# Altium PCB Guillaume_Lanfroid-Nazac.PcbDoc (part 1 of 2)
Units mil, origin at the board's own origin, x right, y up, seen from the top; angles counter-clockwise.
Board outline 2755.91 x 1968.5 mil, 4 copper layers (Top Layer 1, GND, VCC, Bottom Layer 1), stack 61.948 mil thick; 93 components, 75 nets, 367 pads, 172 vias.
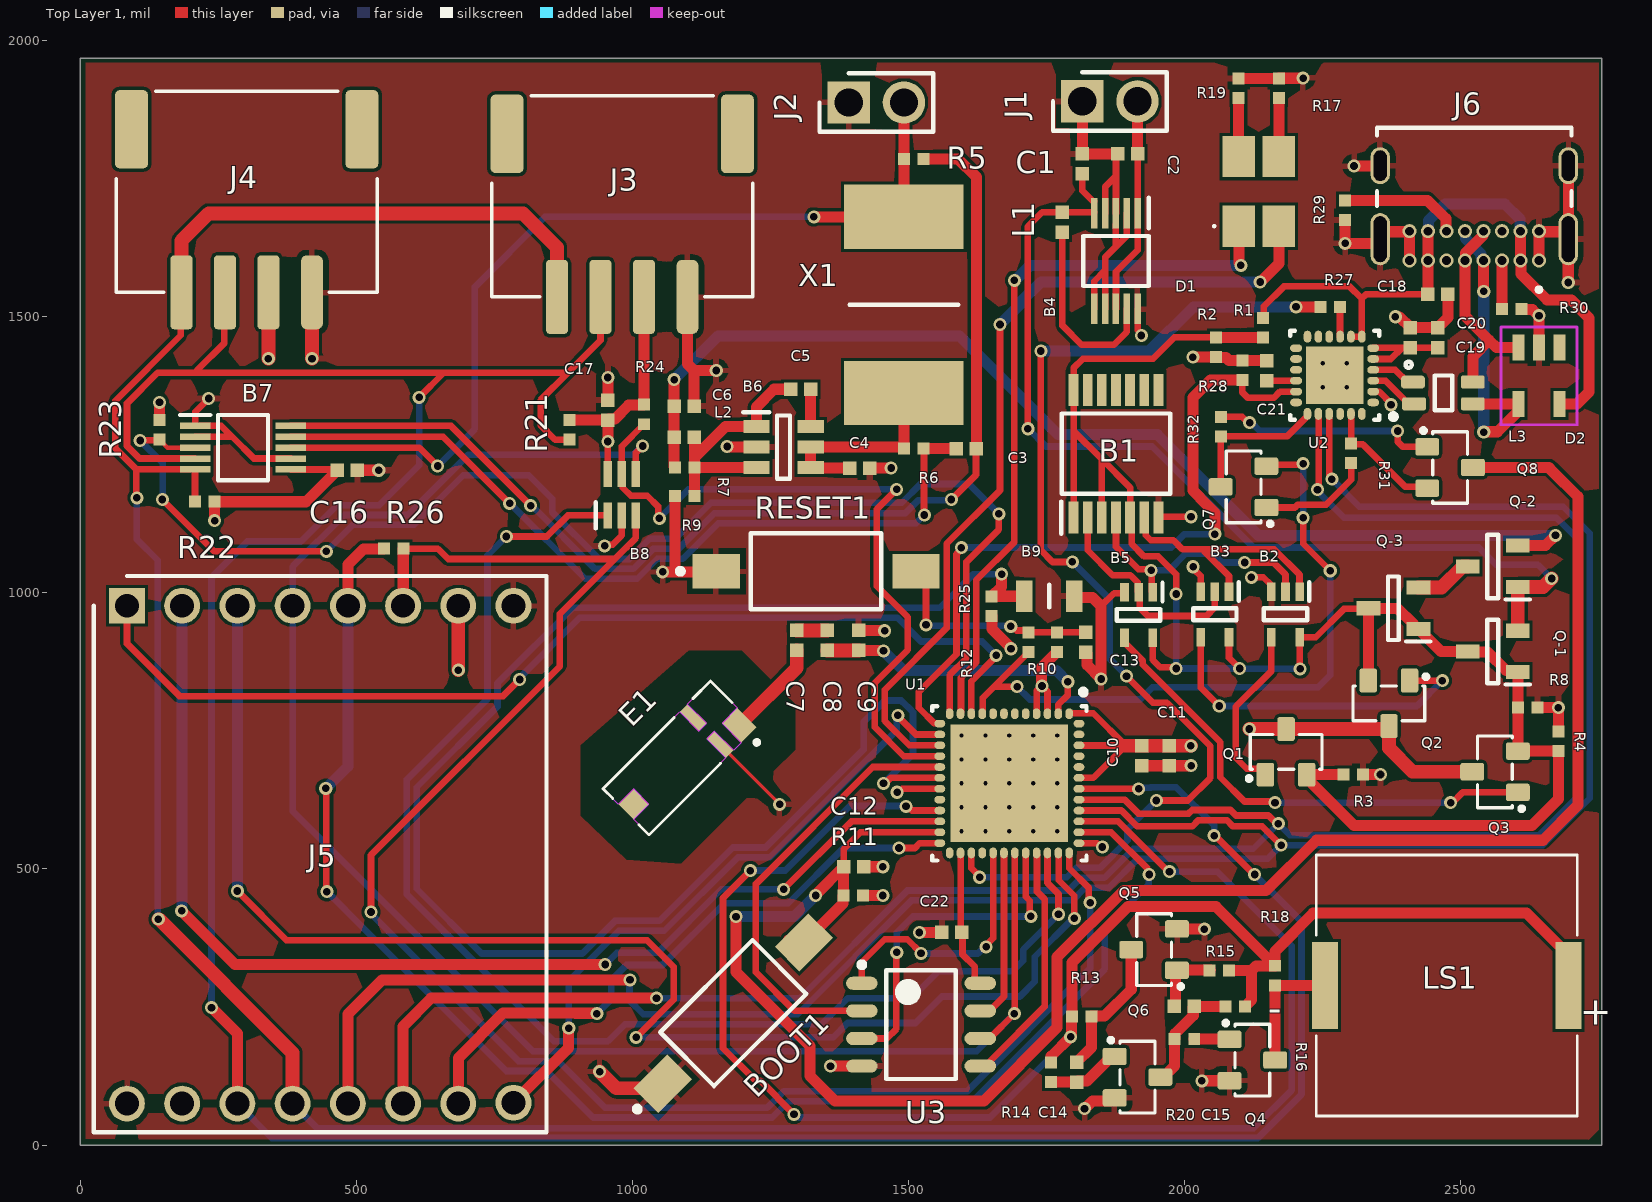
[diagram p0: Top Layer 1 view]
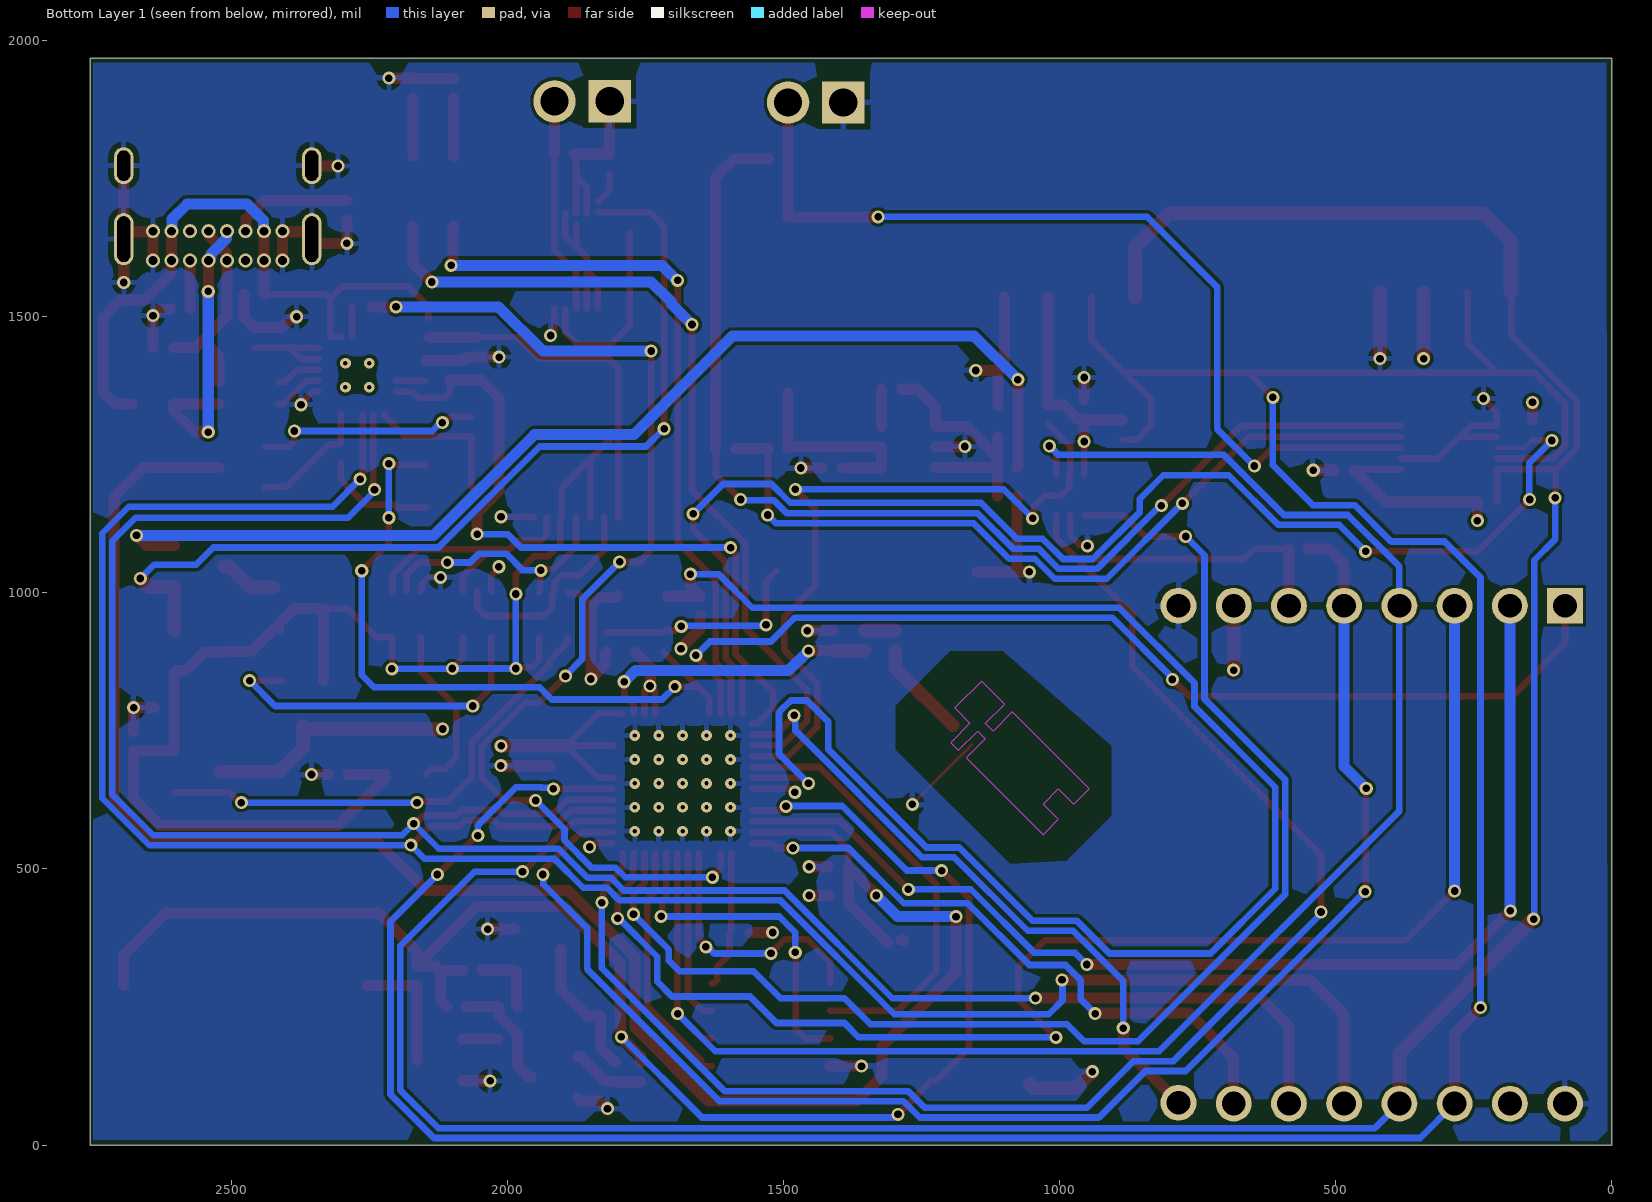
[diagram p1: Bottom Layer 1 view, seen from below]
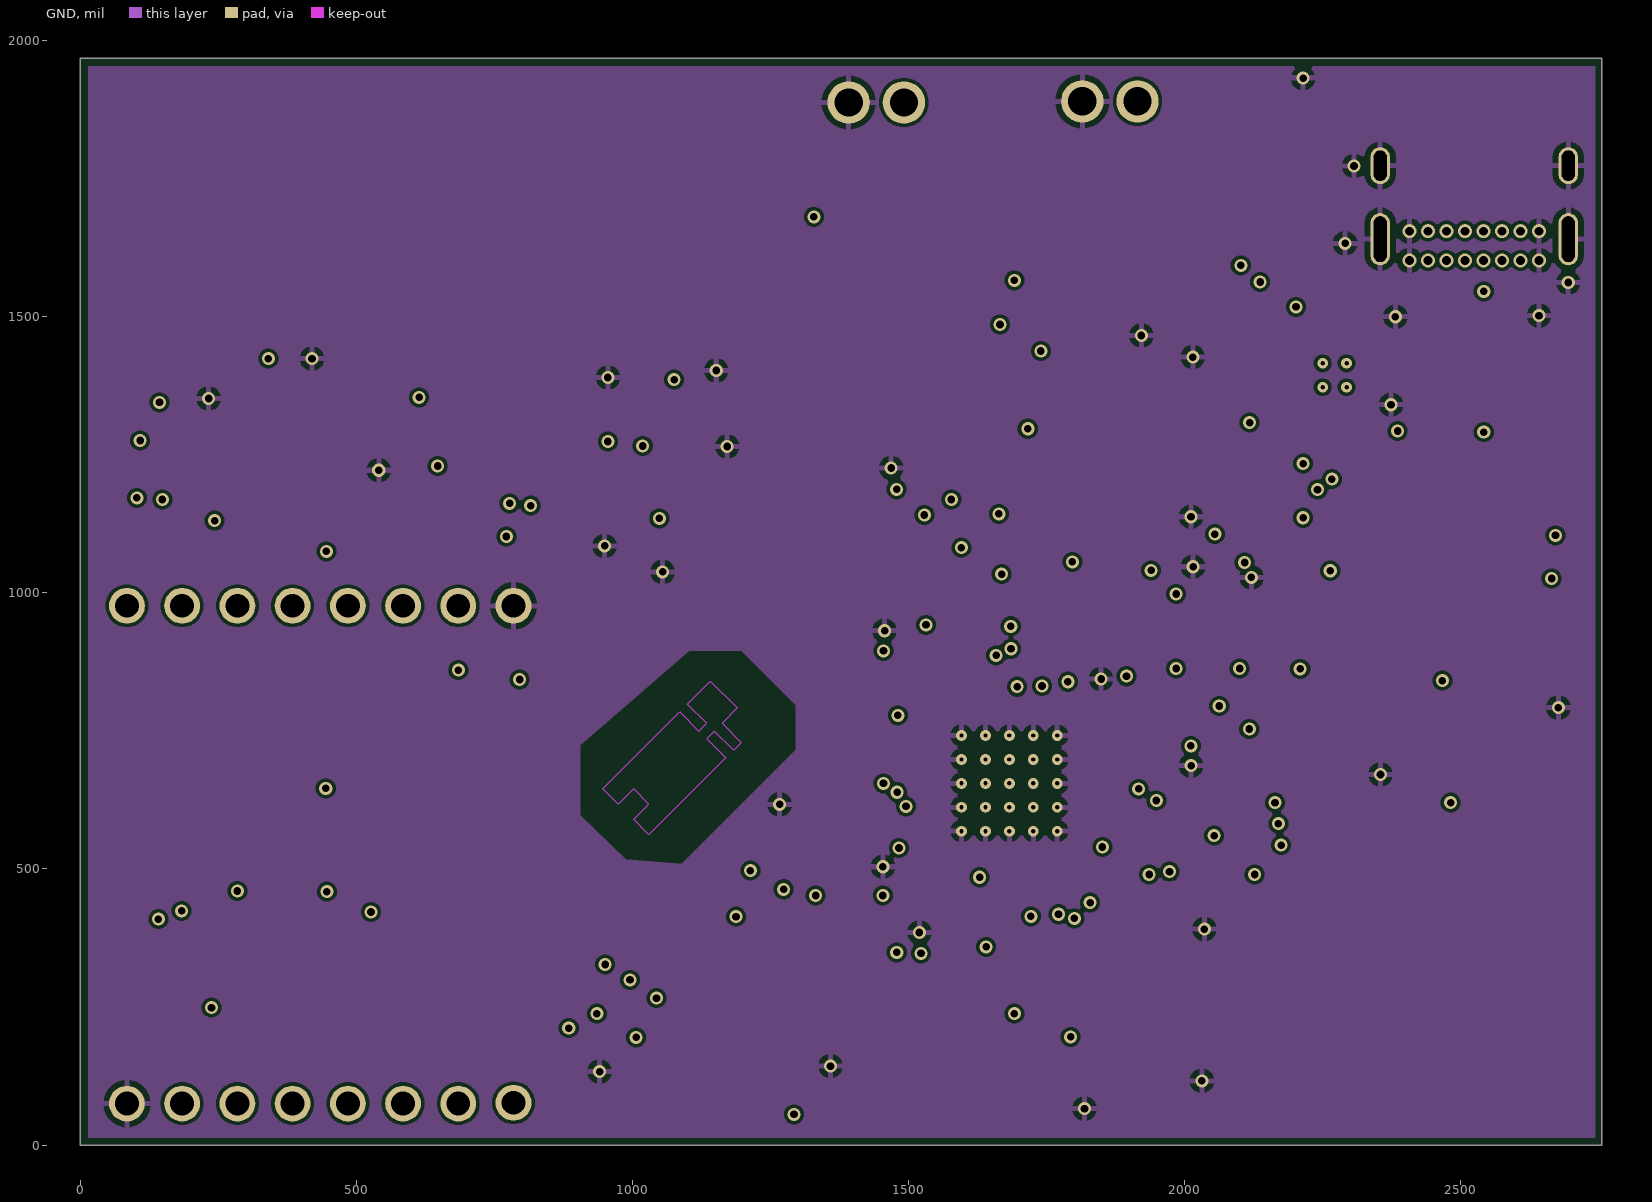
[diagram p2: GND]
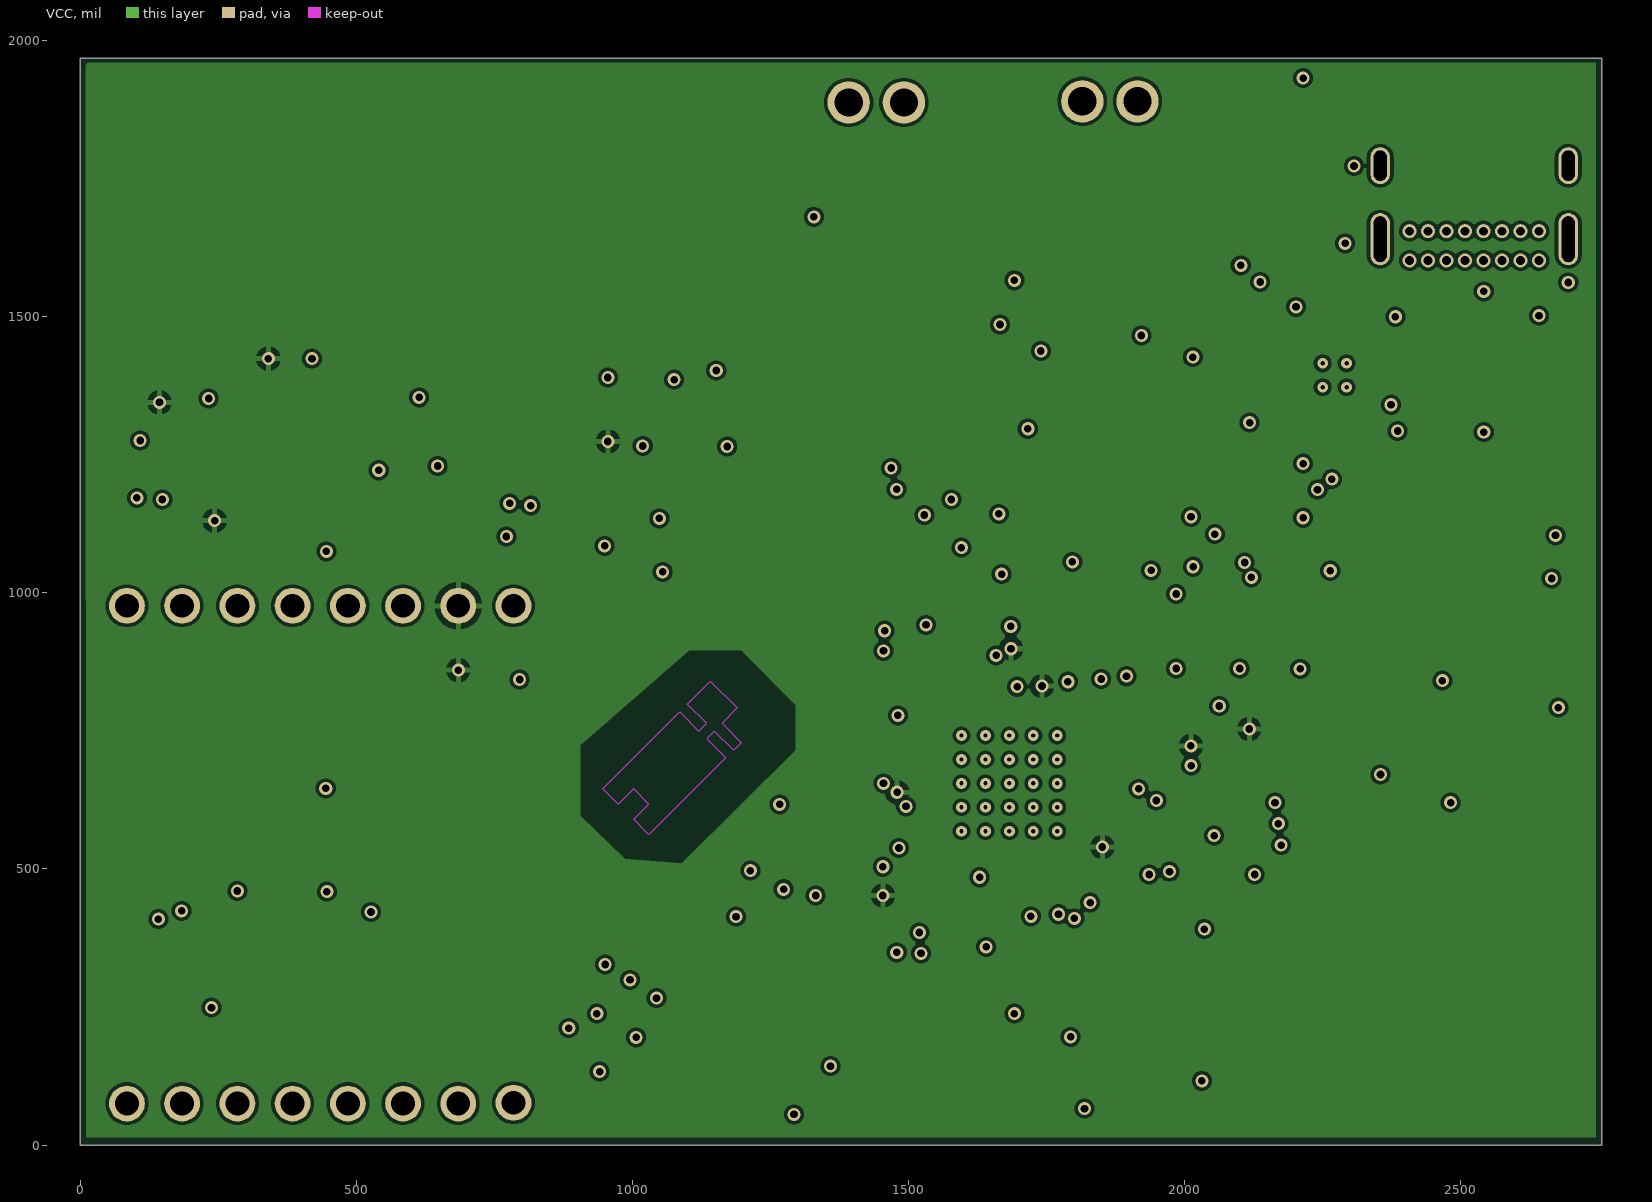
[diagram p3: VCC]

## Layer stack, top to bottom
Top Solder: solder mask 0.4, Solder Resist, Dk 3.5
Top Layer 1: signal copper 1.378
Dielectric 4: prepreg 7.1, PP-021, Dk 4.7
Dielectric 2: prepreg 7.1, PP-021, Dk 4.7
GND: signal copper 1.4
Dielectric 1: core 27.9921, Core-042, Dk 4.8
VCC: signal copper 1.4
Dielectric 3: prepreg 7.1, PP-021, Dk 4.7
Dielectric 5: prepreg 7.1, PP-021, Dk 4.7
Bottom Layer 1: signal copper 1.378
Bottom Solder: solder mask 0.4, Solder Resist, Dk 3.5

## Board outline
0,0 2755.91,0 2755.91,1968.5 0,1968.5

## Design rules (kind name [scope] priority, off if disabled: settings)
Clearance Clearance_OLTTTPPP [OnOutside] p1: gap=5.91 ignorepadtopadclearanceinfootprint=TRUE
Clearance Clearance_ILTTTPPP [All] p2: gap=5.91 ignorepadtopadclearanceinfootprint=TRUE except(7.87: Arc-Hole Track-Hole SMDPad-Hole THPad-Hole Via-Hole Fill-Hole Poly-Hole Region-Hole)
HoleSize HoleSize_2 [InComponent('U2')] p1: absolutevalues=TRUE maxlimit=39370.08 minlimit=7.87 maxpercent=80.000 minpercent=20.000
HoleSize HoleSize_1 [InComponent('U1')] p2: absolutevalues=TRUE maxlimit=39370.08 minlimit=7.87 maxpercent=80.000 minpercent=20.000
HoleSize [All] p3: absolutevalues=TRUE maxlimit=39370.08 minlimit=9.84 maxpercent=80.000 minpercent=20.000
HoleToHoleClearance HoleToHoleClearance_uVia_same_layer_inner [IsMicroVia and ((StartLayer = 'Inner 1') and (StopLayer = 'Inner 2')) vs IsMicroVia and ((StartLayer = 'Inner 1') and (StopLayer = 'Inner 2'))] p1: gap=3.94 allowstackedmicrovias=FALSE
HoleToHoleClearance HoleToHoleClearance_uVia_same_layer_top [IsMicroVia and ((StartLayer = 'Top Layer') and (StopLayer = 'Inner 1')) vs IsMicroVia and ((StartLayer = 'Top Layer') and (StopLayer = 'Inner 1'))] p2: gap=3.94 allowstackedmicrovias=FALSE
HoleToHoleClearance HoleToHoleClearance_uVia [IsMicroVia vs IsMicroVia] p3: gap=0.39 allowstackedmicrovias=FALSE
HoleToHoleClearance [All] p4: gap=3.94 allowstackedmicrovias=FALSE
MinimumAnnularRing MinimumAnnularRing_uVia [IsMicroVia] p1: minimumring=3.54
MinimumAnnularRing MinimumAnnularRing_OAR [OnOutside] p2: minimumring=4.92
MinimumAnnularRing MinimumAnnularRing_IAR [All] p3: minimumring=4.92
MinimumSolderMaskSliver [All] p1: minsoldermaskwidth=2
PolygonConnect [All] p1: connectstyle=Relief reliefconductorwidth=10 reliefentries=4 polygonreliefangle="90 Angle" airgapwidth=10
RoutingVias RoutingVias_1 [InComponent('U1')] p1: holewidth=19.68 width=39.37 viastyle="Through Hole" minholewidth=19.68 minwidth=39.37 maxholewidth=1968.5 maxwidth=2362.2
RoutingVias RoutingVias_uVia [All] p2: holewidth=3.94 width=11.02 viastyle="Through Hole" minholewidth=3.94 minwidth=11.02 maxholewidth=3.94 maxwidth=11.02
RoutingVias [All] p3: holewidth=13.78 width=23.62 viastyle="Through Hole" minholewidth=3.94 minwidth=11.02 maxholewidth=118.11 maxwidth=127.95
SilkToSilkClearance [InComponent('U1')] p1: silktosilkclearance=10
SilkToSolderMaskClearance [IsText vs InComponent('U1')] p1: minsilkscreentomaskgap=10 clearancetoexposedcopper=TRUE
SolderMaskExpansion [All] p1: expansion=0 istentingtop=FALSE
SupplyNets "Schematic Supply Nets_2" [InNet('GND')] p1: voltage=0.000
SupplyNets "Schematic Supply Nets_1" [InNet('VBUS')] p2: voltage=0.000
SupplyNets "Schematic Supply Nets" [InNet('3V3')] p3: voltage=0.000
ViasUnderSMD [IsMicroVia] p1: allowed=TRUE
Width Width_ILTW [All] p1: maxlimit=118.11 minlimit=5.91 preferedwidth=5.91
25 further rules are at their usual default settings.

## Classes and differential pairs
component class UART: C18 C19 C20 C21 D2 J6 L3 Q7 Q8 R27 R28 R29 R30 R31 R32 U2
component class SPI: B8 B9 C17 R24 R25 R26
component class I2C: B7 C16 J3 J4 R21 R22 R23
component class HIM: BOOT1 C12 C13 C14 C15 D1 LS1 Q4 Q5 Q6 R10 R11 R12 R13 R14 R15 R16 R17 R18 R19 R20 RESET1
component class ESP: C10 C11 C22 U1
component class ANTENNE: C7 C8 C9 E1
component class ALIM_MOSFET: B1 B2 B3 B4 B5 B6 C1 C2 C3 C4 C5 C6 J1 J2 L1 L2 Q1 Q2 Q3 Q-1 Q-3 R1 R2 R3 R4 R5 R6 R7 R8 R9 X1

## Components (designator, comment, footprint, x,y, rotation, side; value= is the part's Value field where it differs from the comment)
B1 "74VHC05FT" SOP65P640X120-14N 1876,1252 r90 top
B2 "MC74VHC1GT08DFT2G" SOT65P210X110-5N 2183,961 r270 top
B3 "MC74VHC1GT08DFT2G" SOT65P210X110-5N 2055,961 r270 top
B4 "TPS62056DGSG4" SOP50P490X110-10N 1876,1601 r270 top
B5 "MC74VHC1GT08DFT2G" SOT65P210X110-5N 1917,960 r270 top
B6 "LMR50410Y3FQDBVRQ1" SOT95P280X145-6N 1274,1264 r0 top
B7 "INA237AIDGST" SOP50P490X110-10N 295.16,1262.89 r0 top
B8 "TMP126DCKR" SOT65P210X110-6N 981,1177.6 r90 top
B9 "NB12K00103JBB" RESC2212X50N 1755.43,994 r0 top
BOOT1 "FSMSM" TECO-FSMSM-2_V 1183,239 r45 top
C1 "22uF" CAPC1005X06N 1815,1777 r90 top
C2 "2,2uF" CAPC1005X06N 1897,1795 r180 top
C3 "50uF" CAPC1005X06N 1605,1261 r180 top
C4 "2,2uF" CAPC1005X06N 1412,1226 r0 top
C5 "0,1uF" CAPC1005X06N 1305,1369 r0 top
C6 "10uF" CAPC1005X06N 1094,1338 r0 top
C7 "0,9pF" CAPC1005X06N 1298.06,913.83 r90 top
C8 "0,6pF" CAPC1005X06N 1353.06,913.94 r270 top
C9 "1pF" CAPC1005X06N 1410.06,913.83 r270 top
C10 "10uF/6.3V(10%)" CAPC1005X06N 1923,705.11 r90 top
C11 "0.1uF/6.3V(10%)" CAPC1005X06N 1972.57,704.83 r90 top
C12 "1uF" CAPC1005X06N 1401,504 r0 top
C13 "1uF" CAPC1005X06N 1821,910.72 r270 top
C14 "0.01µF" CAPC1005X06N 1805,132 r270 top
C15 "0.01µF" CAPC1005X06N 2000,251 r0 top
C16 "100nF" CAPC1005X06N 484,1222 r0 top
C17 "0.1µF" CAPC1005X06N 956,1331 r90 top
C18 "1.5uF" CAPC1005X06N 2409,1462 r90 top
C19 "0.1uF" CAPC1005X06N 2459,1462 r90 top
C20 "1uF" CAPC1005X06N 2459,1541 r0 top
C21 "4.7uF" CAPC1005X06N 2149,1402 r90 top
C22 "100nF" CAPC1005X06N 1579,385 r180 top (schematic designator C?)
D1 "598-8610-207F" 5988610207F 2134.58,1727.01 r90 top
D2 "824011" 824011 2642,1393 r180 top
E1 "NN03-320" XCVR_NN03-320 1086,701 r45 top
J1 "61300211121" 61300211121 1815,1890 r0 top
J2 "61300211121" 61300211121 1392,1888 r0 top
J3 "114020164" 114020164 981.89,1685.61 r180 top
J4 "114020164" 114020164 301.89,1693.84 r180 top
J5 "825433-8" Connect-Mikrobus 85,976.57 r0 top
J6 "Use" USB4085-GF-A 2524.8,1773.5 r180 top
L1 "10uF" LQPC1005X06N 1669,1781.11 r90 top
L2 "3,3uH" LQPC1005X06N 983.89,1172 r180 top
L3 "Filtre en mode commun" 744232090 2469,1362 r0 top (schematic designator L?)
LS1 "PKLCS1212E40A1-R1" SPKR_PKLCS1212E40A1-R1 2475,289 r180 top
Q1 "BSS123" BSS123 2184,712 r0 top
Q2 "BSS123" BSS123 2370.34,800 r180 top
Q3 "BSS123" BSS123 2562.34,676 r90 top
Q4 "SS8050-G" SS8050-G 2123,154 r270 top
Q5 "SS8050-G" SS8050-G 1945,354 r90 top
Q6 "SS8050-G" SS8050-G 1915,123 r270 top
Q7 "SS8050-G" SS8050-G 2107,1192 r90 top
Q8 "SS8050-G" SS8050-G 2481,1227 r270 top
Q-1 "FDV304P" SOT95P251X112-3N 2558.34,894 r180 top (schematic designator "Q -1")
Q-2 "FDV304P" SOT95P251X112-3N 2558.34,1048 r180 top (schematic designator "Q -2")
Q-3 "FDV304P" SOT95P251X112-3N 2378.34,972 r180 top (schematic designator "Q -3")
R1 "2K" RESC1005X06N 2142,1480 r270 top
R2 "1K" RESC1005X06N 2057,1445 r270 top
R3 "10K" RESC1005X06N 2306,671 r0 top
R4 "10K" RESC1005X06N 2677,731 r90 top
R5 "50ohm" RESC1005X06N 1510,1786 r0 top
R6 "50ohm" RESC1005X06N 1510,1261 r0 top
R7 "10K" RESC1005X06N 1095,1227 r0 top
R8 "10K" RESC1005X06N 2621.34,792 r0 top
R9 "90K" RESC1005X06N 1095,1175 r180 top
R10 "10kΩ" RESC1005X06N 1769,910.72 r270 top
R11 "10kΩ" RESC1005X06N 1400,452 r0 top
R12 "0Ω" RESC1005X06N 1718,910.72 r270 top
R13 "510Ω" RESC1005X06N 1814,233 r180 top
R14 "20kΩ" RESC1005X06N 1758,132 r90 top
R15 "20kΩ" RESC1005X06N 2063,316 r0 top
R16 "510Ω" RESC1005X06N 2092,251 r0 top
R17 "150Ω" RESC1005X06N 2171,1914 r270 top
R18 "1kΩ" RESC1005X06N 2164,307 r90 top
R19 "150Ω" RESC1005X06N 2098,1914 r270 top
R20 "1kΩ" RESC1005X06N 2000,192 r0 top
R21 "2kΩ" RESC1005X06N 886,1295 r270 top
R22 "2kΩ" RESC1005X06N 226,1165 r180 top
R23 "10kΩ" RESC1005X06N 144,1295 r270 top
R24 "10kΩ" RESC1005X06N 1021,1323 r90 top
R25 "10kΩ" RESC1005X06N 1651,976 r90 top
R26 "10kΩ" RESC1005X06N 568,1080 r180 top
R27 "4.7k" RESC1005X06N 2264,1518 r0 top
R28 "10k" RESC1005X06N 2105,1403 r90 top
R29 "5.1k" RESC1005X06N 2291,1693 r270 top
R30 "5.1k" RESC1005X06N 2593,1514 r0 top
R31 "10k" RESC1005X06N 2302,1253 r270 top
R32 "10k" RESC1005X06N 2066,1301 r90 top
RESET1 "FSMSM" TECO-FSMSM-2_V 1333,1039 r0 top
U1 "ESP32-PICO-D4" PQFN50P700X700X104_HS-49N 1683,655 r270 top
U2 "CP2104-F03-GM" PQFN50P400X400X80_HS-25N 2272,1394 r180 top
U3 "IS66WVS1M8BLL-104NLI" SOIC127P600X175-8N 1523,218 r0 top (schematic designator U?)
X1 "PSR400ITQFF0L50" RESC10052X200N 1492,1521.55 r270 top

## Footprints (in the part's own frame and the unit in brackets; to place one, negate y for a bottom-side part, rotate by r counter-clockwise, add the part's x,y. Pads: shape width x height; smd on the part's side, far side on the other; paste and mask are expansions set on the pad)
824011 [mil] "Suppresseurs ESD / diodes TVS WE-TVS High Speed 5uA 5VDC 2+1"
  rect 21.65x47.24 smd: 1(-37.4,-51.18) 2(0,-51.18) 3(37.4,-51.18) 4(37.4,51.18) 5(-37.5,51)
  Top Layer 1 keep-out lines w5: 68.9,88.58 -68.9,88.58 -68.9,-88.58 68.9,-88.58 68.9,88.58
  body extent -57,-55 57,55, height 57
114020164 [mm]
  rrect50% 1x3.4 smd: 1(-3,3.8)
  rrect30% 1x3.4 smd: 2(-1,3.8) 3(1,3.8) 4(3,3.8)
  rrect26% 1.5x3.6 smd: MP1(-5.3,-3.7) MP2(5.3,-3.7)
  silkscreen extent -6,-5.45 6,3.8, body extent -6.1,-5.59 5.9,4.59, height 5.2
744232090 [mm]
  rrect50% 1.1x0.6 smd: 1(-1.4,0.5)
  rrect33% 1.1x0.6 smd: 2(1.35,0.5) 3(1.35,-0.5) 4(-1.35,-0.5)
  silkscreen extent -1.74,-0.8 0.4,1.44, body extent -1.6,-0.8 1.6,0.8, height 1.8
5988610207F [mm]
  rect 1.9x1.5 smd: 1(-1.6,0.925) 2(1.6,0.925) 3(-1.6,-0.925) 4(1.6,-0.925)
  silkscreen extent -1.65,2 -1.55,2.1, body extent -1.6,-1.35 1.6,1.35, height 0.9
61300211121 [mm] "Embases et logements de câbles WR-PHD 2.54mm 2Pin T HT Header"
  rect 1.95x1.95 / inner round 1.95 / far side rect 1.95x1.95 hole 1.3: 1(0,0)
  round 1.95 hole 1.3: 2(2.54,0)
  silkscreen extent -1.35,-1.35 3.89,1.35
BSS123 [mm]
  rrect25% 0.8x1.1 smd paste+0 mask+0.075: 1(-0.95,-1.05) 2(0.95,-1.05) 3(0,1.05)
  silkscreen extent -1.77,-1.3 1.65,0.8, body extent -1.5,-1.3 1.5,1.3, height 1.1
CAPC1005X06N [mm] "Chip Capacitor, 2-Leads, Body 1,00x0,50mm, IPC Medium Density"
  rect 0.62x0.62 smd: 1(-0.46,0) 2(0.46,0)
  body extent -0.53,-0.28 0.53,0.28, height 0.55
Connect-Mikrobus [mm]
  rect 1.65x1.65 / inner round 1.65 / far side rect 1.65x1.65 hole 1.1: 1(0,0)
  round 1.65 hole 1.1: 2(2.54,0) 3(5.08,0) 4(7.62,0) 5(10.16,0) 6(12.7,0) 7(15.24,0) 8(17.78,0) 9(17.78,-22.86) 10(15.24,-22.9) 11(12.7,-22.9) 12(10.16,-22.9) 13(7.62,-22.9) 14(5.08,-22.9) 15(2.54,-22.9) 16(0,-22.9)
  silkscreen extent -1.52,-24.22 19.3,1.37, body extent -1.37,-24.18 19.14,1.28, height 6.7
LQPC1005X06N [mm]
  rect 0.62x0.62 smd: 1(-3.254,-2.794) 2(-2.334,-2.794)
  body extent -3.32,-3.07 -2.27,-2.52, height 0.55
PQFN50P400X400X80_HS-25N [mm] "PQFN, 24-Leads, Body 4,00x4,00mm, Pitch 0,50mm, Thermal Pad 2,65x2,65mm, IPC Medium Density"
  oval 0.55x0.35 smd: 1(-1.775,1.25) 2(-1.775,0.75) 3(-1.775,0.25) 4(-1.775,-0.25) 5(-1.775,-0.75) 6(-1.775,-1.25) 13(1.775,-1.25) 14(1.775,-0.75) 15(1.775,-0.25) 16(1.775,0.25) 17(1.775,0.75) 18(1.775,1.25)
  oval 0.35x0.55 smd: 7(-1.25,-1.775) 8(-0.75,-1.775) 9(-0.25,-1.775) 10(0.25,-1.775) 11(0.75,-1.775) 12(1.25,-1.775) 19(1.25,1.775) 20(0.75,1.775) 21(0.25,1.775) 22(-0.25,1.775) 23(-0.75,1.775) 24(-1.25,1.775)
  rect 2.65x2.65 smd: 25(0,0)
  silkscreen extent -2.83,-2.05 2.05,2.05, body extent -2.05,-2.05 2.05,2.05, height 0.8
PQFN50P700X700X104_HS-49N [mm] "PQFN, 48-Leads, Body 7,00x7,00mm, Pitch 0,50mm, Thermal Pad 5,40x5,40mm, IPC Medium Density"
  oval 0.5x0.35 smd: 1(-3.2,2.75) 2(-3.2,2.25) 3(-3.2,1.75) 4(-3.2,1.25) 5(-3.2,0.75) 6(-3.2,0.25) 7(-3.2,-0.25) 8(-3.2,-0.75) 9(-3.2,-1.25) 10(-3.2,-1.75) 11(-3.2,-2.25) 12(-3.2,-2.75) 25(3.2,-2.75) 26(3.2,-2.25) 27(3.2,-1.75) 28(3.2,-1.25) 29(3.2,-0.75) 30(3.2,-0.25) 31(3.2,0.25) 32(3.2,0.75) 33(3.2,1.25) 34(3.2,1.75) 35(3.2,2.25) 36(3.2,2.75)
  oval 0.35x0.5 smd: 13(-2.75,-3.2) 14(-2.25,-3.2) 15(-1.75,-3.2) 16(-1.25,-3.2) 17(-0.75,-3.2) 18(-0.25,-3.2) 19(0.25,-3.2) 20(0.75,-3.2) 21(1.25,-3.2) 22(1.75,-3.2) 23(2.25,-3.2) 24(2.75,-3.2) 37(2.75,3.2) 38(2.25,3.2) 39(1.75,3.2) 40(1.25,3.2) 41(0.75,3.2) 42(0.25,3.2) 43(-0.25,3.2) 44(-0.75,3.2) 45(-1.25,3.2) 46(-1.75,3.2) 47(-2.25,3.2) 48(-2.75,3.2)
  rect 5.4x5.4 smd: 49(0,0)
  silkscreen extent -4.32,-3.55 3.55,3.55, body extent -3.55,-3.55 3.55,3.55, height 1.04
RESC1005X06N [mm] "Chip Resistor, 2-Leads, Body 1,00x0,50mm, IPC Medium Density"
  rect 0.55x0.55 smd: 1(-0.45,0) 2(0.45,0)
  body extent -0.53,-0.28 0.53,0.28, height 0.55
RESC2212X50N [mm]
  rect 0.75x1.45 smd: 1(-1.15,0) 2(1.15,0)
  silkscreen extent 0,-0.53 0,0.53, body extent -1.07,-0.63 1.07,0.63, height 0.5
RESC10052X200N [mm]
  rect 2.95x5.5 smd: 1(-4.05,0) 2(4.05,0)
  silkscreen extent 0,-2.5 0,2.5, body extent -5,-2.6 5,2.6, height 2
SOIC127P600X175-8N [mm] "SOIC, 8-Leads, Body 4,90x3,90mm, Pitch 1,27mm, IPC Medium Density"
  oval 1.45x0.6 smd: 1(-2.725,1.905) 2(-2.725,0.635) 3(-2.725,-0.635) 4(-2.725,-1.905) 5(2.725,-1.905) 6(2.725,-0.635) 7(2.725,0.635) 8(2.725,1.905)
  silkscreen extent -2.85,-2.5 1.6,2.88, body extent -3,-2.5 3,2.5, height 1.75
SOP50P490X110-10N [mm]
  rect 1.4x0.3 smd: 1(-2.2,1) 2(-2.2,0.5) 3(-2.2,0) 4(-2.2,-0.5) 5(-2.2,-1) 6(2.2,-1) 7(2.2,-0.5) 8(2.2,0) 9(2.2,0.5) 10(2.2,1)
  silkscreen extent -2.9,-1.5 1.15,1.5, body extent -2.46,-1.5 2.46,1.5, height 1.06
SOP65P640X120-14N [mm]
  rect 1.475x0.45 smd: 1(-2.938,1.95) 2(-2.938,1.3) 3(-2.938,0.65) 4(-2.938,0) 5(-2.938,-0.65) 6(-2.938,-1.3) 7(-2.938,-1.95) 8(2.938,-1.95) 9(2.938,-1.3) 10(2.938,-0.65) 11(2.938,0) 12(2.938,0.65) 13(2.938,1.3) 14(2.938,1.95)
  silkscreen extent -3.67,-2.5 1.85,2.52, body extent -3.1,-2.75 3.3,2.75, height 1.1
SOT65P210X110-5N [mm]
  rect 0.85x0.4 smd: 1(-1.05,0.65) 2(-1.05,0) 3(-1.05,-0.65) 4(1.05,-0.65) 5(1.05,0.65)
  silkscreen extent -1.48,-1 0.28,1.1, body extent -0.95,-1 1.15,1, height 1.1
SOT65P210X110-6N [mm]
  rect 1.2x0.4 smd: 1(-0.95,0.65) 2(-0.95,0) 3(-0.95,-0.65) 4(0.95,-0.65) 5(0.95,0) 6(0.95,0.65)
  silkscreen extent -1.55,1.2 -0.35,1.2, body extent -1.05,-1 1.05,1, height 1
SOT95P251X112-3N [mm]
  rect 1.1x0.65 smd: 1(-1.15,0.95) 2(-1.15,-0.95) 3(1.15,0)
  silkscreen extent -1.7,-1.46 0.25,1.53, body extent -1.25,-1.46 1.25,1.46, height 1.12
SOT95P280X145-6N [mm]
  rect 1.2x0.6 smd: 1(-1.25,0.95) 2(-1.25,0) 3(-1.25,-0.95) 4(1.25,-0.95) 5(1.25,0) 6(1.25,0.95)
  silkscreen extent -1.85,-1.45 0.3,1.6, body extent -1.4,-1.45 1.4,1.45, height 1.2
SPKR_PKLCS1212E40A1-R1 [mm]
  rect 1.2x4 smd: N(5.6,0) P(-5.6,0)
  silkscreen extent -6,-6 6,6, body extent -6,-6 6,6, height 3
SS8050-G [mm]
  rrect25% 0.8x1.1 smd paste+0 mask+0.075: 1(-0.95,-1.05) 2(0.95,-1.05) 3(0,1.05)
  silkscreen extent -1.77,-1.3 1.65,0.8, body extent -1.5,-1.3 1.5,1.3, height 1.1
TECO-FSMSM-2_V [mm] "SMD, 2-Leads, Body 6x3.5mm, Pitch 9.19mm"
  rect 2.2x1.6 smd: 1(-4.595,0)
  rect 2.18x1.6 smd: 2(4.595,0)
  silkscreen extent -6.37,-1.75 3,1.75, body extent -4.98,-1.75 4.98,1.75, height 4.4
USB4085-GF-A [mm]
  round 0.65 hole 0.4: A1(-2.975,4.36) A4(-2.125,4.36) A5(-1.275,4.36) A6(-0.425,4.36) A7(0.425,4.36) A8(1.275,4.36) A9(2.125,4.36) A12(2.975,4.36) B1(2.975,3.01) B4(2.125,3.01) B5(1.275,3.01) B6(0.425,3.01) B7(-0.425,3.01) B8(-1.275,3.01) B9(-2.125,3.01) B12(-2.975,3.01)
  oval 0.9x1.7 hole 0.6 slot 1.4 at 90 deg: S1(-4.325,0) S2(4.325,0)
  oval 0.9x2.4 hole 0.6 slot 2.1 at 90 deg: S3(-4.325,3.38) S4(4.325,3.38)
  silkscreen extent -4.47,-1.74 4.47,5.8, body extent -4.47,-4.25 4.47,4.92, height 3.46
XCVR_NN03-320 [mm]
  rect 1x1 smd: 1(-3,0)
  rect 0.5x1.25 smd: 2(1.75,-0.875) 4(1.75,0.875)
  rect 1x1.25 smd: 3(3,-0.875)
  Keep-Out Layer region: 3.5,-0.25 2.5,-0.25 2.5,-1.5 2,-1.5 2,-0.25 1.5,-0.25 1.5,-1.5 -3.5,-1.5 -3.5,-0.5 -2.5,-0.5 -2.5,0.5 -3.5,0.5 -3.5,1.5 1.5,1.5 1.5,0.25 2,0.25 2,1.5 3.5,1.5
  silkscreen extent -3.5,-2.1 3.5,1.5, body extent -3.5,-1.5 3.5,1.5, height 2.02

## Part data
B1: "Logic Gates CMOS LOGIC IC INVERTER", Manufacturer_Name=Toshiba, Mouser Part Number=757-74VHC05FT, Manufacturer_Part_Number=74VHC05FT
B2 B3 B5: "Single 2-Input AND Gate, TTL Level", Manufacturer_Name=onsemi, Manufacturer_Part_Number=MC74VHC1GT08DFT2G
B4: "TEXAS INSTRUMENTS - TPS62056DGSG4 - Synchronous Buck (Step Down) Switching Regulator, Fixed, 2.7V-10Vin, 3.3V/0.8A out, 850kHz, VSSOP-10", Manufacturer_Name="Texas Instruments", Mouser Part Number=595-TPS62056DGSG4, Manufacturer_Part_Number=TPS62056DGSG4
B6: "Régulateurs de tension de commutation Automotive qualified SIMPLE SWITCHER 4-V to 36-V, 1-A synchronous step-down converter 6-SOT-23 -40 to 150", Manufacturer_Name="Texas Instruments", Mouser Part Number=595-R50410Y3FQDBVRQ1, Manufacturer_Part_Number=LMR50410Y3FQDBVRQ1
B7: "Current Sense Amplifiers 85-V, 16-bit, I2C output current/voltage/power monitor with alert 10-VSSOP -40 to 125", Manufacturer_Name="Texas Instruments", Mouser Part Number=595-INA237AIDGST, Manufacturer_Part_Number=INA237AIDGST
B8: "Board Mount Temperature Sensors +/-0.25 C SPI temperature sensor with 175 C operation, CRC and slew-rate alert", Manufacturer_Name="Texas Instruments", Mouser Part Number=595-TMP126DCKR, Manufacturer_Part_Number=TMP126DCKR
B9: "NTC SMD Thermistor, NB12K, 10K, 5% AVX 10k 0805 Protection NTC Thermistor, 5s, 2 x 1.25 x 1.3mm", Manufacturer_Name="Kyocera AVX", Mouser Part Number=581-NB12K00103JBB, Arrow Part Number=NB12K00103JBB, Arrow Price/Stock=https://www.arrow.com/en/products/nb12k00103jbb/avx, Datasheet Link=https://datasheet.datasheetarchive.com/originals/distributors/Datasheets-DGA6/551314.pdf, Geometry.Height=0.5mm, Manufacturer_Part_Number=NB12K00103JBB, Mouser Price/Stock=https://www.mouser.co.uk/ProductDetail/AVX/NB12K00103JBB/?qs=4%252B6%252BTdINQeDPvI%252BQUQjJ3Q%3D%3D
BOOT1 RESET1: library part CMP-2000-07511-1, "FSMSM Push Button Switch, 50 mA, -35 to 85 degC, 2-Pin SMD, RoHS, Bulk", Case\/Package=SMD/SMT, Contact Current Rating=50mA, Contact Resistance=100mOhm, Manufacturer="TE Connectivity", Max Operating Temperature=85degC, Max Voltage Rating (DC)=12V, Min Operating Temperature=-35degC, Operating Force=180gf, Package Description="2-Pin Surface Mount Device, Body 6 x 3.5 mm, Pitch 9.19 mm", Package Quantity=1000, Voltage Rating (DC)=24V, Actuator Length=1.07mm, Actuator Material=Polyamide, Contact Material=Brass, Contact Plating=Silver, Current Rating=50mA, Datasheet URL=http://www.te.com/commerce/DocumentDelivery/DDEController?Action=showdoc&DocId=Customer+Drawing%7F1437566-3%7FC2%7Fpdf%7FEnglish%7FENG_CD_1437566-3_C2_1437566_3_1_c.dwg.pdf%7F1437566-3, Datasheet Version="Rev. C2, 08/2014", Electrical Life=20000Cycles, ELV=Compliant, Illumination Type=Illuminated, Lead Free=LeadFree, Manufacturer URL=http://www.te.com/, Mechanical Life=20000Cycles, Mount=SurfaceMount, Mounting Technology=SurfaceMount, Orientation=Straight, Package Reference=FSMSM, Packaging=LoosePiece, REACH SVHC=Unknown, RoHSCompliant=true, Switch Travel=0.25mm, Termination=GullWing, Throw Configuration=SPST
C1 C2 C3 C4 C5 C6 C7 C8 C9 C10 C11 C12 C13 C14 C15 C16 C17 C18 C19 C20 C21 C22: library part Capacitor
D1: "Standard LEDs - SMD Red/Green WC 80/50mcd 645/570nm", Manufacturer_Name=Dialight, Mouser Part Number=645-598-8610-207F, Arrow Part Number=598-8610-207F, Arrow Price/Stock=https://www.arrow.com/en/products/598-8610-207f/dialight?region=nac, Datasheet Link=https://media.digikey.com/pdf/Data%20Sheets/Dialight%20PDFs/598%20Series%201210%20Pkg%20Bi-Color.pdf, Geometry.Height=0.8mm, Manufacturer_Part_Number=598-8610-207F, Mouser Price/Stock=https://www.mouser.co.uk/ProductDetail/Dialight/598-8610-207F?qs=7JStj%2FjQ2SFuCjosqwklHQ%3D%3D
D2: "TVS Diode Array WE-TVS, High Speed Series  - Low capazity - No leakage current - Low clamping voltage - high ESD voltage protection  -- USB 1.0 - 2.0"
E1: "Dual port antenna booster for GNSS, Bluetooth, 5G and UWB (1561 - 1606MHz, 2400 - 2500MHz, 3400 - 3800MHz, 3100 - 4800MHz and 6000 - 10600 MHz), signal booster", Manufacturer_Name=Ignion, Mouser Part Number=128-NN03-320, Manufacturer_Part_Number=NN03-320
J1 J2: "WURTH ELEKTRONIK - 61300211121 - HEADER, 2.54MM, PIN, THT, VERTICAL, 2WAY"
J3 J4: "Seeed Studio Accessories Grove Female Header - SMD-4P-2.0mm-90D-20Pcs", Manufacturer_Name="Seeed Studio", Mouser Part Number=713-114020164, Manufacturer_Part_Number=114020164
J5: library part Connect-Mikrobus, "Headers & Wire Housings 8P double for connection mikrobus", Manufacturer_Name="TE Connectivity", Mouser Part Number=571-825433-8, Manufacturer_Part_Number=825433-8
J6: library part USB4085-GF-A, "Connecteurs USB USB Type C, 2.0, Rec, TH , G/F, RA , Top Mnt, T & R"
L1 L2: library part Bobine
L3: library part 744232090, "Bobines / filtres en mode commun WE-CNSW 1206 370mA 90Ohm 100MHz AECQ200"
LS1: "Buzzers Transducer, Externally Driven Piezo 1.5V 2kHz 70dB @ 1.5V, 10cm Surface Mount Solder Pads", Package=None, Availability=Unavailable, MF="Murata Electronics", MP=PKLCS1212E40A1-R1, Price=None
Q1 Q2 Q3: "BSS123 N-Channel MOSFET, 170 mA, 100 V PowerTrench, 3-Pin SOT-23 ON Semiconductor"
Q4 Q5 Q6 Q7 Q8: "Bipolar Transistors - BJT NPN TRANSISTOR 1.5A 40V"
Q-1 Q-2 Q-3: "ON SEMICONDUCTOR - FDV304P - Power MOSFET, P Channel, 25 V, 460 mA, 1.22 ohm, SOT-23, Surface Mount", Manufacturer_Name=onsemi, Mouser Part Number=512-FDV304P, Arrow Part Number=FDV304P, Arrow Price/Stock=https://www.arrow.com/en/products/fdv304p/on-semiconductor?utm_currency=USD&region=europe, Datasheet Link=https://componentsearchengine.com/Datasheets/2/FDV304P.pdf, Geometry.Height=1.12mm, Manufacturer_Part_Number=FDV304P, Mouser Price/Stock=https://www.mouser.co.uk/ProductDetail/onsemi-Fairchild/FDV304P?qs=FOlmdCx%252BAA1BAlCQZu888w%3D%3D
R1 R2 R3 R4 R5 R6 R7 R8 R9 R10 R11 R12 R13 R14 R15 R16 R17 R18 R19 R20 R21 R22 R23 R24 R25 R26 R27 R28 R29 R30 R31 R32: library part Resistor
U1: library part ESP32, "Système RF sur puce - SoC SIP module ESP32 with 4MByte Flash, Dual Core MCU, Wi-Fi & Bluetooth Combo, LGA48-pin, 7*7mm", Manufacturer 1="Espressif Systems", Supplier Part Number 1=1904-1029-1-ND, Manufacturer Part Number 1=ESP32-PICO-D4, Supplier 1=Digi-Key
U2: library part USBBridge, "USB Bridge, USB to UART USB 2.0 UART Interface 24-QFN (4x4)", Manufacturer 1="Silicon Labs", Manufacturer Part Number 1=CP2104-F03-GM, Supplier 1="Arrow Electronics", Supplier Part Number 1=CP2104-F03-GM
U3: library part SRAM, "SRAM 8Mb, SerialRAM, 2.7V-3.6V, 104MHz, 8 pin SOIC 150 mil, RoHS", Manufacturer 1=ISSI, Supplier Part Number 1=706-IS66WVS1M8BLL-104NLI-ND, Manufactuer Part Number 1=IS66WVS1M8BLL-104NLI, Supplier 1=Digi-Key
X1: "ROHM - PSR400ITQFF0L50 - SMD Current Sense Resistor, 500 ohm, PSR Series, 3921 [1052 Metric], 4 W, +/- 1%, Metal Strip", Manufacturer_Name="ROHM Semiconductor", Mouser Part Number=755-PSR400ITQFF0L50, Datasheet Link=https://componentsearchengine.com/Datasheets/2/PSR400ITQFF0L50.pdf, Geometry.Height=2mm, Manufacturer_Part_Number=PSR400ITQFF0L50, Mouser Price/Stock=https://www.mouser.co.uk/ProductDetail/ROHM-Semiconductor/PSR400ITQFF0L50?qs=493kPxzlxfLaT1w5Mo%252BtHg%3D%3D

## Via types
v1: diameter 23.62, hole 13.78, Top Layer 1 to Bottom Layer 1, 143 vias
v2: diameter 19.68, hole 7.87, Top Layer 1 to Bottom Layer 1, 29 vias

## Nets (pads, with @x,y where several pads share a name; then routed paths per layer and width w, separated by ;. In a path a pad name is that pad's centre, name@x,y a point inside that pad or via, vN(x,y) a via of type N, cw(c..) or ccw(c..) an arc to the next point about the centre after c; other vN are vias at no path point)
3V3: B7.6 B8.6 C10.2 C11.2 C16.1 C17.1 J3.2 J4.2 J5.7 Q1.3 Q2.3 Q3.3 R10.2 R11.2 R21.1 R22.1 R23.1 R24.2 R25.1 U1.1 U1.3 U1.4 U1.19 U1.37 U1.43 U1.46 | length 2409.9
  Top Layer 1 w12: B7.6@381.77,1223.52 381.86,1223.43 464.46,1223.43 C16.1@465.89,1222 ; B8.6@955.41,1215 B8.6@955.7,1215.3 ; B8.6@955.7,1230.45 B8.6@955.7,1215.3 ; C17.1@955.7,1312.59 C17.1@956,1312.89 ; v1(956,1274) 955.7,1273.7 B8.6@955.7,1215.3 ; v1@1480.27,639.16 1483.16,639.16 1489.16,645.16 U1.19@1557.02,645.16 ; U1.4@1732.21,780.98 1732.21,822.21 v1@1742,832 ; v1(1742,831.28) 1752.09,821.2 1752.09,781.17 U1.3@1751.9,780.98 ; U1.1@1791.27,780.98 1791.27,781.24 1792.09,782.06 1834.72,782.06 1893.22,723.56 U1.46@1809.32,723.56 ; U1.37@1808.98,546.73 1841.12,546.73 1848.09,539.77 v1(1851.23,539.77) ; U1.43@1808.98,664.84 1809.32,665.18 1835.18,665.18 1893.22,723.22
  Top Layer 1 w20: R23.1@144,1312.72 v1(144,1345) ; v1(243.82,1130.63) v1(243.82,1130.63) 243.77,1164.95 R22.1@243.72,1165 408.89,1165 C16.1@465.89,1222 ; R21.1@886,1312.72 886.09,1312.8 955.91,1312.8 C17.1@956,1312.89 ; v1(956,1274) C17.1@956,1312.89 ; J3.2@1021.26,1536 1021.13,1535.87 1021.13,1340.85 R24.2@1021,1340.72 1020.17,1339.89 993.68,1339.89 968.89,1315.09 958.2,1315.09 C17.1@956,1312.89 ; R11.2@1417.72,452 v1(1454,452) ; R25.1@1651,958.28 1651.25,958.03 1651.25,934.45 1685.96,899.75 v1(1685.96,898.77) ; v1(1742,831.28) 1742,832.26 1741,833.26 1741,865 R10.2@1769,893
  Top Layer 1 w25: v1(341,1424) 341.26,1424.26 J4.2@341.26,1544.24 ; v1(685,860) J5.7@685,976.57 ; 1893.22,723.22 C10.2@1923,723.22 ; C10.2@1923.28,722.94 C11.2@1972.57,722.94 v1(2011.76,722.94) ; v1(2117.41,753.34) Q1.3@2184,753.34 2367.09,753.34 2370.34,756.59 Q2.3@2370.34,758.66 2370.34,718.66 2413,676 Q3.3@2521,676
  other v1: 1479.73,638.87
GND: B1.7 B2.3 B3.3 B4.2 B4.3 B4.4 B4.6 B4.7 B4.10 B5.3 B6.2 B7.1 B7.2 B7.7 B8.2 B9.2 BOOT1.1 C1.2 C2.2 C4.2 C6.2 C9.1 C10.1 C11.1 C12.2 C13.2 C16.2 C17.2 C18.2 C19.2 C20.2 C21.2 C22.2 D2.2 E1.2 J1.1 J2.1 J3.1 J4.1 J5.8 J5.16 J6.A1 J6.A12 J6.B1 J6.B12 J6.S1 J6.S2 J6.S3 J6.S4 Q4.2 Q5.2 Q6.2 R2.2 R3.2 R4.2 R8.2 R9.2 R17.1 R19.1 R28.2 R29.2 R30.2 RESET1.1 U1.49 U2.2 U3.4 | length 4307
  Top Layer 1 w5.91: E1.2@1159.08,725.36 1159.08,724.92 v1(1267,617)
  Top Layer 1 w12: B7.2@208.54,1282.58 275.52,1282.58 ; v1(233,1352) 208.54,1327.54 B7.1@208.54,1302.26 255.83,1302.26 275.52,1282.58 ; B7.7@381.77,1243.21 314.89,1243.21 275.52,1282.58 ; v1(950,1085) 952.22,1087.22 964.22,1087.22 981,1104 B8.2@981,1140.2 ; v1(1267,617) v1@1267,617.44 ; B4.6@1836.63,1514.39 1836.63,1564.31 1856.32,1584 ; 1849.11,975.89 1872.56,999.34 1889.54,999.34 1891.41,1001.22 B5.3@1891.41,1001.34 ; B4.7@1856.32,1514.39 1856.32,1584 ; B4.4@1856.32,1687.61 1856.32,1735.22 1876.09,1755 ; B4.3@1875.91,1666.06 1875.91,1626.91 ; B4.3@1876,1687.61 1876.09,1687.71 1876.09,1755 ; C2.2@1878.83,1795.06 1876.09,1792.31 1876.09,1755 ; B4.2@1895.68,1687.61 1895.68,1646.68 1875.91,1626.91 ; B4.10@1915.37,1514.39 1915.46,1514.29 1915.46,1475.68 1922,1469.14 v1(1922,1466) ; B1.7@1952.77,1136.33 1954.24,1137.8 v1(2011.81,1137.8) ; v1(2015.75,1047.24) 2015.75,1044.1 2029.41,1030.44 B3.3@2029.41,1002.34 ; Q4.2@2075.76,116.6 Q4.2@2081.66,116.6 ; v1(2121.3,1028.16) 2142.84,1028.16 2155.54,1015.46 2155.54,1004.21 B2.3@2157.41,1002.34 ; U2.2@2341.88,1364.47 2342.22,1364.13 2353.05,1364.13 2374.13,1343.06 v1(2374.13,1340.65) ; 1856.32,1584 1856.32,1607.32 1875.91,1626.91
  Top Layer 1 w20: C16.2@502.11,1222 v1(541,1222) ; C17.2@956,1349.11 v1(956,1390) ; v1(1055.18,1038) 1055.33,1038.14 1077.14,1038.14 ; R9.2@1077.28,1175 1077.14,1174.86 1077.14,1038.14 ; J3.1@1100,1536 1100,1414.59 1112.11,1402.48 ; C6.2@1112.11,1338 1112.11,1402.48 ; RESET1.1@1151.09,1038 1077,1038 1077.14,1038.14 ; v1(1152.16,1402.61) 1152.03,1402.48 1112.11,1402.48 ; v1(1172,1265) 1172.5,1264.5 1224.29,1264.5 B6.2@1224.79,1264 ; v1(1359,143) U3.4@1415.72,143 ; C9.1@1410.06,931.94 1410.34,931.66 1456.72,931.66 v1(1457,931.38) ; C12.2@1419.11,504 v1(1454,504) ; C4.2@1430.11,1226 v1(1469,1226) ; v1(1520,385) C22.2@1560.89,385 ; B9.2@1800.71,994 1802.72,994 1805.47,991.24 1833.76,991.24 1849.11,975.89 1849.11,844.11 v1(1849,844) ; J1.1@1815,1890 C1.2@1815,1795.11 1815.06,1795.06 C2.2@1878.83,1795.06 ; v1(1819,66) 1819.98,66 1833.83,79.85 1867.91,79.85 Q6.2@1873.66,85.6 ; C13.2@1821,892.61 1823.2,890.4 1823.2,869.8 v1@1848.31,844.69 ; C10.1@1923,687 1923.14,686.86 1972.43,686.86 C11.1@1972.57,686.72 1972.71,686.86 2011.86,686.86 v1(2012,687) ; Q5.2@1986.34,391.4 1986.54,391.2 2035.8,391.2 v1(2036,391) ; v1(2015.1,1426.9) 2015.29,1427.09 2056.81,1427.09 R2.2@2057,1427.28 ; v1(2031.44,116.38) 2031.54,116.49 2081.55,116.49 Q4.2@2081.66,116.6 ; R2.2@2057.3,1427.59 2057.3,1426.98 2057.83,1426.46 2074.98,1426.46 2080.72,1420.72 R28.2@2105,1420.72 C21.2@2148.39,1420.72 ; R19.1@2098,1931.72 R17.1@2171,1931.72 2171.14,1931.86 2214.86,1931.86 v1(2215,1932) ; R29.2@2291,1675.28 v1(2291,1633) 2347.4,1633 2354.53,1640.13 J6.S4@2354.53,1640.43 2354.53,1646.8 2361.66,1653.93 2406.61,1653.93 J6.B1@2407.68,1655 J6.A12@2407.68,1601.85 J6.A12@2408.34,1601.19 ; v1(2307,1773) 2307.25,1773.25 2354.28,1773.25 J6.S2@2354.53,1773.5 ; R3.2@2323.72,671 v1(2355,671) ; v1(2381.89,1500) 2382.58,1499.31 2389.8,1499.31 C18.2@2409,1480.11 C19.2@2459,1480.11 2477.11,1498.22 C20.2@2477.11,1541 ; R30.2@2610.72,1514 2611.54,1513.17 2629.85,1513.17 2641.02,1502 v1(2642,1502) D2.2@2642,1444.18 D2.2@2641.17,1445.01 ; R8.2@2639.06,792 v1(2677,792) R4.2@2677,748.72 ; J6.A1@2641.93,1601.85 J6.B12@2641.93,1655 2643,1653.93 2687.95,1653.93 J6.S3@2695.08,1646.8 ; v1(2695,1562) 2695.04,1562.04 2695.04,1640.39 J6.S3@2695.08,1640.43 J6.S3@2695.08,1646.8 ; J6.S1@2695.08,1773.5 J6.S3@2695.08,1646.8
  Top Layer 1 w25: v1(420,1424) J4.1@420,1544.24 ; v1(941,133) 971.27,102.73 1046.73,102.73 BOOT1.1@1055.08,111.08
  other v2: 1596.39,568.39 1639.69,568.39 1683,568.39 1726.31,568.39 1769.61,568.39 1596.39,611.69 1639.69,611.69 1683,611.69 1726.31,611.69 1769.61,611.69 1596.39,655 1639.69,655 1683,655 1726.31,655 1769.61,655 1596.39,698.31 1639.69,698.31 1683,698.31 1726.31,698.31 1769.61,698.31 1596.39,741.61 1639.69,741.61 1683,741.61 1726.31,741.61 1769.61,741.61
NetB1_1: B1.1 B1.3 B1.5 B1.14 B2.5 B3.5 B5.5 Q1.2 Q2.2 Q3.2 Q-1.1 Q-1.3 Q-3.1 Q-3.3 R1.2 R2.1 R3.1 R4.1 R8.1 | length 3187.9
  Top Layer 1 w12: B1.1@1799.23,1136.33 1799.23,1293 ; B1.3@1850.41,1136.33 1850.41,1241.82 ; B5.5@1942.59,918.66 1942.59,878.55 1955.92,865.22 1982.78,865.22 v1(1985,863) ; v1(1985,998) 1985.09,998.09 1985.09,1033.45 1952.54,1066 1927.05,1066 1904.45,1088.6 1904.45,1133.47 B1.5@1901.59,1136.33 1901.59,1190.64 1850.41,1241.82 ; R2.1@2057,1462.72 1981.72,1462.72 1943,1424 1816,1424 1799.23,1407.23 B1.14@1799.23,1367.67 1799.23,1293 ; B3.5@2080.59,919.66 2080.59,882.41 v1(2100,863) ; v1(2209.65,862.35) 2209.12,862.88 2209.12,919.13 B2.5@2208.59,919.66 2237.66,919.66 2289,971 2332.06,971 2333,971.94 Q-3.3@2333.06,972 ; 1799.23,1293 1850.41,1241.82
  Top Layer 1 w20: R2.1@2057,1462.72 2057.22,1462.5 2141.78,1462.5 R1.2@2142,1462.28 ; R3.1@2288.28,671 2288.11,670.83 2221.57,670.83 Q1.2@2221.4,670.66 2221.4,664.76 2307.16,579 2629.28,579 2677,626.72 R4.1@2677,713.28 2676.94,713.34 Q3.2@2603.68,713.4 Q3.2@2603.68,713.4 R8.1@2603.62,792 ; Q2.2@2332.94,841.34 2333,841.4 Q-3.3@2333,971.94 ; Q-3.3@2333.06,972 2386.21,972 2414.76,943.46 2414.76,934.6 Q-3.1@2423.61,934.6 2435.27,922.94 2464.21,894 Q-1.3@2513.06,894 2513.97,893.1 2549.03,893.1 2582.74,859.39 2600.82,859.39 Q-1.1@2603.61,856.6 R8.1@2603.62,792
  Bottom Layer 1 w12: v1(1985,998) v1(1985,863) v1(2100,863) 2100.32,862.68 2209.32,862.68 v1(2209.65,862.35)